# Altium PCB simple_motor_driver.PcbDoc
Units mil, origin at the board's own origin, x right, y up, seen from the top; angles counter-clockwise.
Board outline 3415 x 1620 mil, 2 copper layers (Top Layer, Bottom Layer); 14 components, 11 nets, 44 pads, 2 vias.
Unrouted connection lines stored in the file: 9.
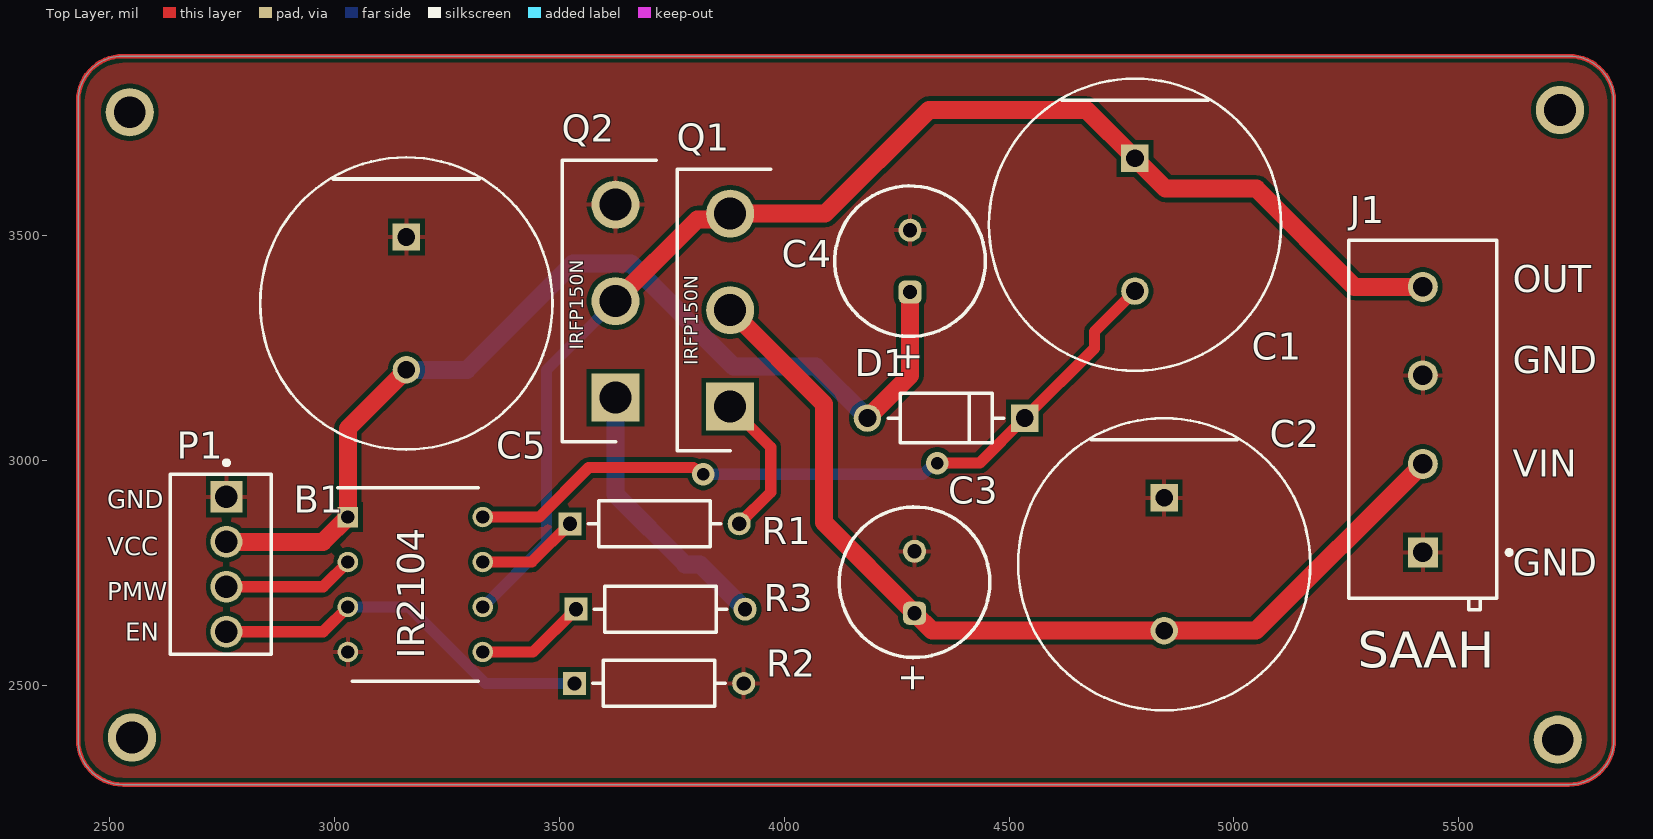
[diagram p0: Top Layer view]
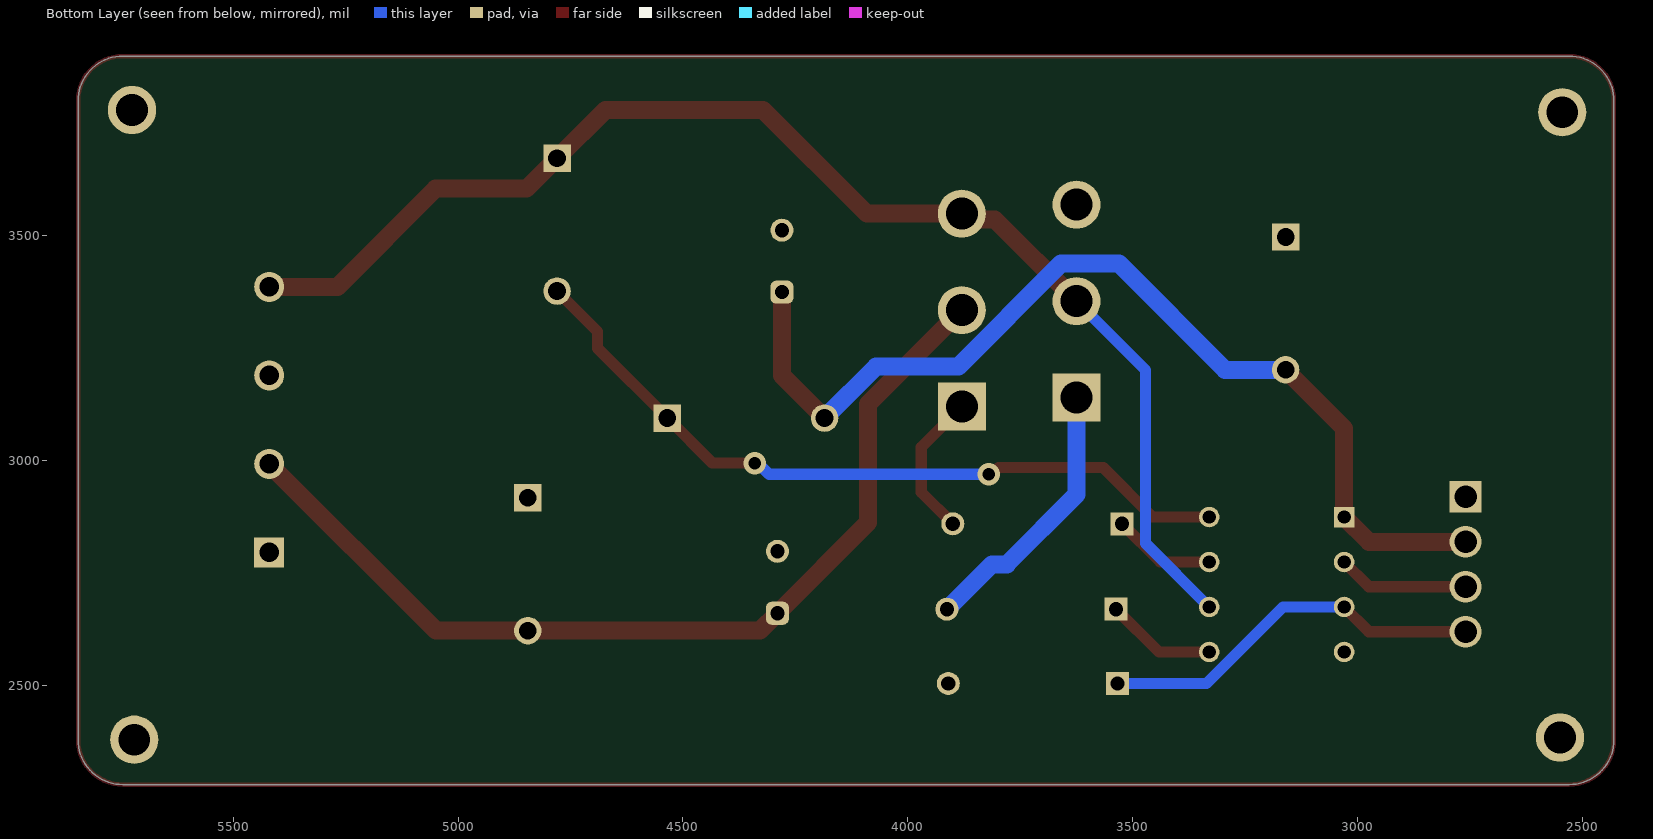
[diagram p1: Bottom Layer view, seen from below]
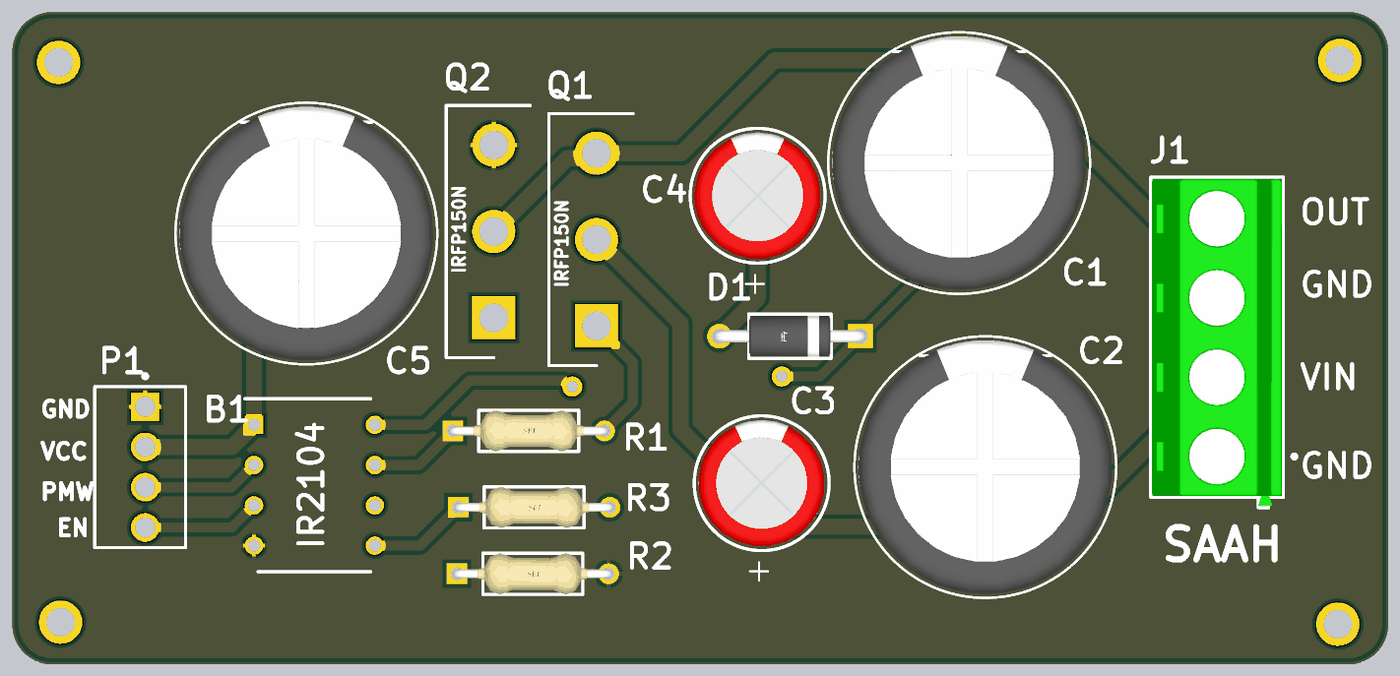
[diagram p2: 3D render of the assembled board from above, using the file's embedded part models]

## Layer stack, top to bottom
Top Solder: solder mask 0.4, Solder Resist, Dk 3.5
Top Layer: signal copper 1.4
Dielectric 1: dielectric 12.6, FR-4, Dk 4.8
Bottom Layer: signal copper 1.4
Bottom Solder: solder mask 0.4, Solder Resist, Dk 3.5

## Board outline
2430,2380 2430,3800 cw(c2530,3800) 2530,3900 5745,3900 cw(c5745,3800) 5845,3800 5845,2380 cw(c5745,2380) 5745,2280 2530,2280 cw(c2530,2380)

## Design rules (kind name [scope] priority, off if disabled: settings)
Clearance [All] p1: gap=10 ignorepadtopadclearanceinfootprint=FALSE
PolygonConnect [All] p1: connectstyle=Relief reliefconductorwidth=10 reliefentries=4 polygonreliefangle="90 Angle" airgapwidth=10
RoutingVias [All] p1: holewidth=28 width=50 viastyle="Through Hole" minholewidth=28 minwidth=50 maxholewidth=28 maxwidth=50
SolderMaskExpansion [All] p1: expansion=4 istentingtop=FALSE
SupplyNets "Schematic Supply Nets" [InNet('GND')] p1: voltage=0.000
Width [All] p1: maxlimit=40 minlimit=10 preferedwidth=25 minimp=50.000000 maximp=50.000000 favimp=50.000000
30 further rules are at their usual default settings.

## Components (designator, comment, footprint, x,y, rotation, side; value= is the part's Value field where it differs from the comment)
B1 "IR2104" DIP762W56P254L988H533Q8N 3180,2725 r0 top
C1 "10uF" FP-RAD-TH-D_16_0_5-L_25_2-MFG 4780,3525 r270 top
C2 "220uF" FP-RAD-TH-D_16_0_5-L_25_2-MFG 4845,2770 r270 top
C3 "100nF" WCAP-ATLL_D8H11.5 4290,2730 r270 top
C4 "100nF" WCAP-ATLL_D8H11.5 4280,3443.9 r270 top
C5 "10uF" FP-RAD-TH-D_16_0_5-L_25_2-MFG 3160,3350 r270 top
D1 "1N4007" FP-1N4007-MFG 4360,3095 r180 top value=15pF
J1 "282836-4" FP-282836-4-MFG 5420,3079.76 r90 top
P1 "640456-4" TECO-640456-4 2760,2770 r90 top
Q1 "IRFP150N" TO545P530X1560X2460-3P 3880,3120.43 r90 top
Q2 "IRFP150N" TO545P530X1560X2460-3P 3625,3140.43 r90 top
R1 "10k" FP-CF14-MFG 3711.81,2860 r0 top
R2 "4.7k" FP-CF14-MFG 3721.81,2505 r0 top
R3 "10k" FP-CF14-MFG 3725,2670 r0 top

## Footprints (in the part's own frame and the unit in brackets; to place one, negate y for a bottom-side part, rotate by r counter-clockwise, add the part's x,y. Pads: shape width x height; smd on the part's side, far side on the other; paste and mask are expansions set on the pad)
DIP762W56P254L988H533Q8N [mil]
  rect 45.59x45.59 / inner round 45.59 / far side rect 45.59x45.59 hole 29.84: 1(-150,150)
  round 45.59 hole 29.84: 2(-150,50) 3(-150,-50) 4(-150,-150) 5(150,-150) 6(150,-50) 7(150,50) 8(150,150)
  silkscreen extent -173,-215 140,215
FP-1N4007-MFG [mm]
  rect 1.55x1.55 hole 1 paste-2539.97 mask+0: 1(-4.44,0)
  round 1.55 hole 1 paste-2539.97 mask+0: 2(4.44,0)
  silkscreen extent -3.26,-1.4 3.26,1.4, body extent -5.32,-1.5 5.32,1.5, height 0.25
FP-282836-4-MFG [mm]
  rect 1.7x1.7 hole 1.1 paste-2539.97 mask+0: 1(-7.2,0)
  round 1.7 hole 1.1 paste-2539.97 mask+0: 2(-2.2,0) 3(2.8,0) 4(7.8,0)
  silkscreen extent -10.43,-5 10.43,4.18, body extent -10.52,-4.28 10.53,4.28, height 0.25
FP-CF14-MFG [mm]
  rect 1.3x1.3 hole 0.8 paste-2539.97 mask+0: 1(-4.78,0)
  round 1.3 hole 0.8 paste-2539.97 mask+0: 2(4.78,0)
  silkscreen extent -3.73,-1.3 3.73,1.3, body extent -5.53,-1.4 5.53,1.4, height 0.25
FP-RAD-TH-D_16_0_5-L_25_2-MFG [mm]
  rect 1.55x1.55 hole 1 paste-2539.97 mask+0: 1(-3.75,0)
  round 1.55 hole 1 paste-2539.97 mask+0: 2(3.75,0)
  silkscreen extent -8.25,-8.25 8.25,8.25, body extent -8.35,-8.35 8.35,8.35, height 0.25
TECO-640456-4 [mm] "Through Hole, 4-Leads, Body 10.16x5.72mm, Pitch 2.54mm"
  rect 1.8x1.8 hole 1.27 paste-2539.97: 1(3.81,0)
  round 1.8 hole 1.27 paste-2539.97: 2(1.27,0) 3(-1.27,0) 4(-3.81,0)
  silkscreen extent -5.08,-2.54 5.86,3.18, body extent -5.08,-2.54 5.08,3.18, height 10.03
TO545P530X1560X2460-3P [mm]
  rect 2.715x2.715 / inner round 2.715 / far side rect 2.715x2.715 hole 1.81: 1(0,0)
  round 2.715 hole 1.81: 2(5.45,0) 3(10.9,0)
  silkscreen extent -2.5,-2.3 13.4,3
WCAP-ATLL_D8H11.5 [mm] "Aluminum Electrolytic Capacitors, 8x11.5mm"
  rrect50% 1.3x1.3 hole 0.8: 1(1.75,0)
  round 1.3 hole 0.8: 2(-1.75,0)
  silkscreen extent -4.25,-4.25 4.25,4.25, body extent -3.99,-4 4,4, height 11.81

## Part data
B1: "Single MOSFET DRIVER, 8 Pin, Plastic, DIP", Manufacturer_Name=Infineon, Supplier Part Number 1=70017128, Datasheet Link=http://uk.rs-online.com/web/p/products/2456067, Geometry.Height=5.33mm, Manufacturer_Part_Number=IR2104, Supplier 1="Allied Electronics"
C1 C2 C5: library part CMP-05427-001116-1, "Aluminum Electrolytic Capacitors (Radial Lead Type) 47uF ±20% 400V", Capacitance=47uF, Case/Package=Radial, Dielectric Material=Aluminium, Leakage Current=1.138mA, Max Operating Temperature=105°C, Min Operating Temperature=-25°C, Package Quantity=100, Ripple Current=1.18A, Tolerance=20%, Voltage=400V, Construction=RADIAL, Diameter=16mm, Dissipation Factor=0.24%, Height=25mm, Height - Seated (Max)=0.984inch, Lead Diameter=0.8mm, Lead Free="Lead Free", Lead Pitch=7.5mm, Length=25mm, Life (Hours)=10000Hour, Mount="Through Hole", Number of Pins=2, Packaging=Bulk, Radiation Hardening=No, REACH SVHC="No SVHC", Ripple Current (AC)=1.18A, RoHS Compliant=Yes, Series=EE, Termination=Radial, Voltage Rating=400V, Voltage Rating (DC)=400V
C3 C4: library part CMP-03913-53914461-1, "860160574013 WCAP-ATLL Aluminum Electrolytic Capacitors", Capacitance=100µF, Case/Package=Radial, Leakage Current=35µA, Max Operating Temperature=105°C, Min Operating Temperature=-55°C, Ripple Current=414mA, Tolerance=20%, Voltage Rating=35V, Diameter=8mm, Height=11.5mm, Lead Pitch=3.5mm, Length=11.5mm, Life (Hours)=7000hours, Material=Aluminium, NexarPartId=53914461, Pitch=3.5mm, REACH SVHC=Unknown, RoHS=Non-Compliant, Voltage Rating (DC)=35V
D1: library part CMP-123542-000001-1, "Rectifier diode 1000 V 1 A DO-41, ,", Capacitance=15pF, Forward Current=1A, Manufacturer=Diotec, Max Junction Temp=+175°C, Max Repetitive Reverse Voltage=1000V, Max Surge Forward Current=27A, Peak Reverse Current=5uA, Temperature="-50°C to +175°C", Temperature Range Low=-50°C, Automotive=No, Category=Diode, ComponentLink2Description=Datasheet, ComponentLink2URL=https://datasheet.octopart.com/1N4007-Diotec-datasheet-62346875.pdf, Device Class L1="Discrete Semiconductors", Device Class L2=Diodes, Device Class L3="Rectifier Diodes", Height=2.8mm, Ipc Land Pattern Name=DIOAD888W100L520D280, Lead Free=Yes, Manufacturer Part Number=1N4007, Octopart=https://octopart.com/1n4007-diotec-4040411, Package=1N4007, Reverse Voltage=1000V, RoHS=TRUE, Temperature Range High=+175°C
J1: library part CMP-03790-46505329-1, "282836-4 Connector, Terminal Block; Wire Receptacle; 4 Pos.; 16-30 AWG; 0.197 in. CL; Sid", Color=Green, Current=13.5A, Flammability Rating="UL94 V-0", Manufacturer Lifecycle Status=ACTIVE, Max Supply Voltage (AC)=300V, Voltage Rating (AC)=250V, Approvals=UL, Connector System=Wire-to-Board, Connector Type=Receptacle, Contact Material=Brass, Contact Plating=Tin, Current Rating=13.5A, Depth=8.2mm, ELV=Compliant, Housing Color=Green, Housing Material=Polyamide, Lead Free="Lead Free", Lead Pitch=5mm, Length=20mm, Lifecycle Status=Production, Max Current Rating=13.5A, Max Voltage Rating (AC)=300V, Mount="Through Hole", NexarPartId=46505329, Number Of Circuits=4, Number Of Contacts=4, Number of Levels=1, Number of Poles=4, Number of Positions=4, Number of Positions Per Level=4, Number Of Rows=1, Operating Supply Voltage=300V, Orientation=Straight, Packaging=Bulk, Pitch=5mm, Plating=Brass, Radiation Hardening=No, REACH SVHC=Unknown, RoHS=Compliant, Tail Length=3.5mm, Termination="Screw, Solder", Thread Size=M3, Voltage=300V, Voltage Rating=300V, Voltage Rating (DC)=250V, Width=10mm, Wire Gauge (Max)=30AWG, Wire Gauge (Min)=30AWG
P1: library part CMP-2000-05419-1, "Male Header, Pitch 2.54 mm, 1 x 4 Position, Height 10.03 mm, Tail Length 3.56 mm, RoHS, Bulk", Color=White, Current, Rating="5 /  / A", Flammability Rating=UL94V-0, Manufacturer="TE Connectivity", Temperature, Operating="-55to+105 /  / degC", Voltage, Rating="250 /  / V", Agency Approvals=CSA,UL, Angle=Straight, Brand/Series=MTA-100Series, Color, Housing=White, Connector Type=MTA-100, Contact Centerline Spacing="0.100 /  / in.", Contact Mating Area Plating=Tin, Contact Plating=Tin, Contact Shape=Square, Contact Termination Area Plating=Tin, Datasheet URL=https://datasheet.ciiva.com/16286/eng-ds-82056-mta-0608-16286228.pdf, Datasheet Version=Dec-14, Length, Overall="0.4 /  / \"", Length, Pin="0.14 /  / \"", Length, Terminal Post="0.14 /  / in.", Manufacturer URL=http://www.te.com/, Material, Contact=CopperAlloy, Material, Housing=Polyester, Mount Angle=Vertical, Mounting Hole Size="0.04 /  / \"", Mounting Type=PCMount, Number Of Contacts=4, Number of Positions=4, Number Of Rows=1, Pin Spacing="0.1 /  / \"", Primary Type=InterconnectSystem, Size, Post="0.025 /  / in.", Special Features=Pinstrip, Standards=RoHSCompliant,ELVCompliant,UL94V-0, Termination=Solder, Type=PCBPlug
Q1 Q2: "N-channel MOSFET,IRFP150N 42A 100V", Manufacturer_Name=Infineon, Mouser Part Number=N/A, Datasheet Link=http://www.infineon.com/dgdl/irfp150n.pdf?fileId=5546d462533600a40153562867fa1fd4, Geometry.Height=5.3mm, Manufacturer_Part_Number=IRFP150N, Mouser Price/Stock=https://www.mouser.co.uk/ProductDetail/Infineon-IR/IRFP150N?qs=Gkr2N%2F2q3o1s6Jt6X18FEA%3D%3D
R1 R2 R3: library part CMP-26528-000003-1, "RES 7.5K OHM 1/4W 5% AXIAL", Case/Package=Axial, Max Operating Temperature=155°C, Max Power Dissipation=250mW, Min Operating Temperature=-55°C, Resistance=7.5kR, Resistor Type="Carbon Film", Temperature Coefficient=-400ppm/°C, Tolerance=5%, Contact Plating=Tin, Diameter=2.3mm, Features="Flame Retardant Coating", Lead Free="Lead Free", Length=0.256inch, Mount="Through Hole", Number of Terminations=2, Packaging="Tape and Reel", Power Rating=250mW, Radiation Hardening=No, RoHS Compliant=Yes, Series=CF

## Free pads (board coordinates)
  round 107.48 hole 70.71: 10(2545,3775) 11(5725,3780) 12(5720,2380) 13(2550,2385)

## Via types
v1: diameter 50, hole 28, Top Layer to Bottom Layer, 2 vias

## Nets (pads, with @x,y where several pads share a name; then routed paths per layer and width w, separated by ;. In a path a pad name is that pad's centre, name@x,y a point inside that pad or via, vN(x,y) a via of type N, cw(c..) or ccw(c..) an arc to the next point about the centre after c; other vN are vias at no path point)
GND: B1.4 C2.1 C3.2 C4.2 C5.1 J1.1 J1.3 P1.1 Q2.3 R2.2
NetB1_3: B1.3 P1.4 R2.1 | length 866.8
  Top Layer w25: P1.4 2975,2620 B1.3
  Bottom Layer w25: B1.3 3165.94,2675 3335.94,2505 R2.1
NetB1_5: B1.5 R3.1 | length 246.2
  Top Layer w25: B1.5 3441.81,2575 R3.1
NetB1_7: B1.7 R1.1 | length 228.8
  Top Layer w25: B1.7 3438.62,2775 R1.1
NetB1_8: B1.8 C1.2 D1.1 | length 1692.3
  Top Layer w25: B1.8 3455.62,2875 3565.62,2985 3798.24,2985 3813.24,2970 v1(3820,2970) ; v1(4340,2995) 4434.8,2995 D1.1 4690,3250.2 4690,3287.36 C1.2
  Bottom Layer w25: v1(3820,2970) 4308.24,2970 4333.24,2995 v1(4340,2995)
NetQ1_1: Q1.1 R1.2 | length 326.7
  Top Layer w25: Q1.1 3970,3030.43 3970,2930 R1.2
NetQ2_1: Q2.1 R3.2 | length 609.2
  Bottom Layer w40: Q2.1 3625,2925 3780,2770 3813.19,2770 R3.2
OUT: B1.6 C1.1 J1.4 Q1.3 Q2.2 | length 2936.1
  Top Layer w40: Q2.2 3806.77,3536.77 3867.2,3536.77 Q1.3 4091.33,3549.57 4321.77,3780 4672.64,3780 C1.1 4847.64,3605 5050,3605 5268.15,3386.85 J1.4
  Bottom Layer w25: B1.6 3471.64,2816.64 3471.64,3201.64 Q2.2
PWM: B1.2 P1.3 | length 292.8
  Top Layer w25: P1.3 2975,2720 B1.2
VCC: B1.1 C4.1 C5.2 D1.2 P1.2 | length 2259.1
  Top Layer w40: P1.2 2975,2820 B1.1 3030,3072.36 C5.2 ; D1.2 4280,3189.8 C4.1
  Bottom Layer w40: C5.2 3294.59,3202.36 3530.67,3438.44 3659.56,3438.44 3776.34,3321.67 3776.34,3320.65 3887.15,3209.84 4070.36,3209.84 D1.2
VIN: C2.2 C3.1 J1.2 Q1.2 | length 2143.4
  Top Layer w40: Q1.2 4088.6,3126.4 4088.6,2862.5 C3.1 4328.74,2622.36 C2.2 5049.21,2622.36 J1.2
copper on no net: | length 9898.3
  Top Layer w10: 2430,2380 ccw(c2530,2380) 2530,2280 5745,2280 ccw(c5745,2380) 5845,2380 5845,3800 ccw(c5745,3800) 5745,3900 2530,3900 ccw(c2530,3800) 2430,3800 2430,2380

## Polygon pours and split planes (outlines as drawn)
GND on Top Layer "GND_L01_P000" (solid, pour order 0): 2430,2380 2430,3800 cw(c2530,3800) 2530,3900 5745,3900 cw(c5745,3800) 5845,3800 5845,2380 cw(c5745,2380) 5745,2280 2530,2280 cw(c2530,2380)

## Silkscreen, mask and mechanical layers (free items; w line width, h text height)
Top Overlay:
  text "OUT" at 5620,3375 h60
  text "IRFP150N" at 3553,3247 h30 r90
  text "IRFP150N" at 3808,3212 h30 r90
  text "GND" at 5620,3195 h60
  text "VIN" at 5620,2965 h60
  text "GND" at 2494.99,2895 h40
  text "VCC" at 2494.99,2790 h40
  text "GND" at 5620,2745 h60
  text "PMW" at 2494.99,2690 h40
  text "EN" at 2534.98,2600 h40
  text "IR2104" at 3200,2560 h60 r90
  text "SAAH" at 5275,2540 h80

## Text inside footprints (layer, text, board x,y; h text height)
C3: Top Overlay "+" at 4260.47,2550.87 h59.06 r270
C4: Top Overlay "+" at 4250.47,3264.76 h59.06 r270